# Altium PCB EP600_V1.6.1.PcbDoc
Units mil, origin at the board's own origin, x right, y up, seen from the top; angles counter-clockwise.
Board outline 8950 x 5110 mil, 2 copper layers (Top Layer, Bottom Layer); 119 components, 92 nets, 376 pads, 70 vias.
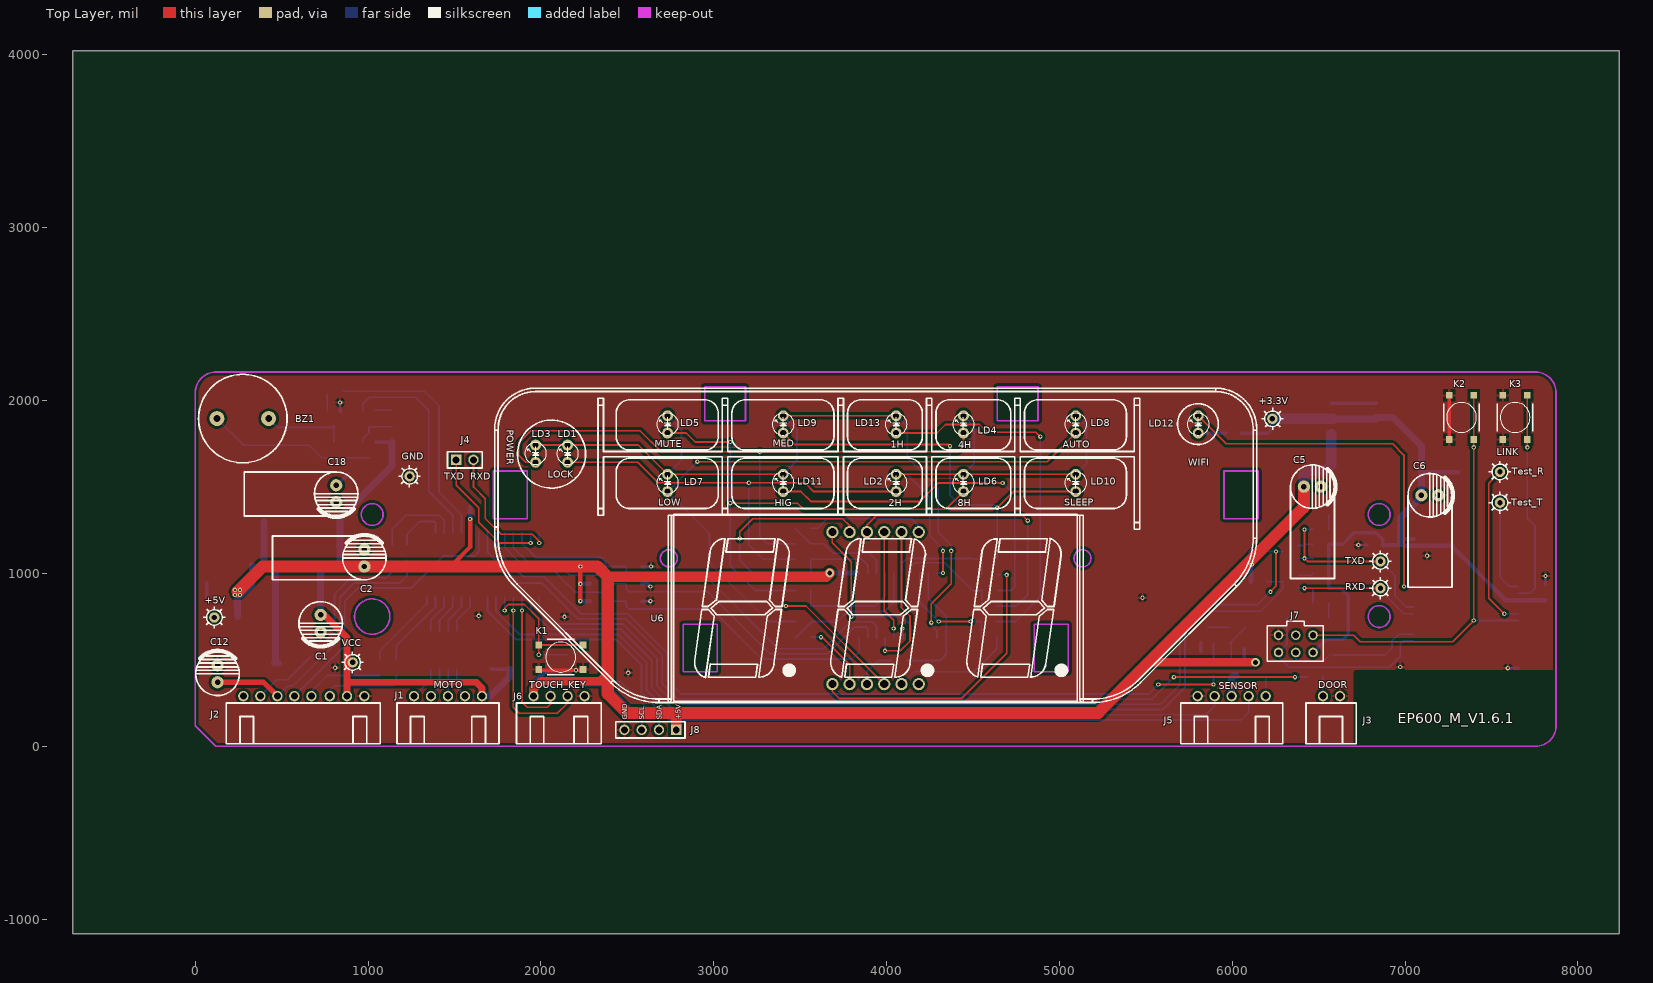
[diagram p0: Top Layer view]
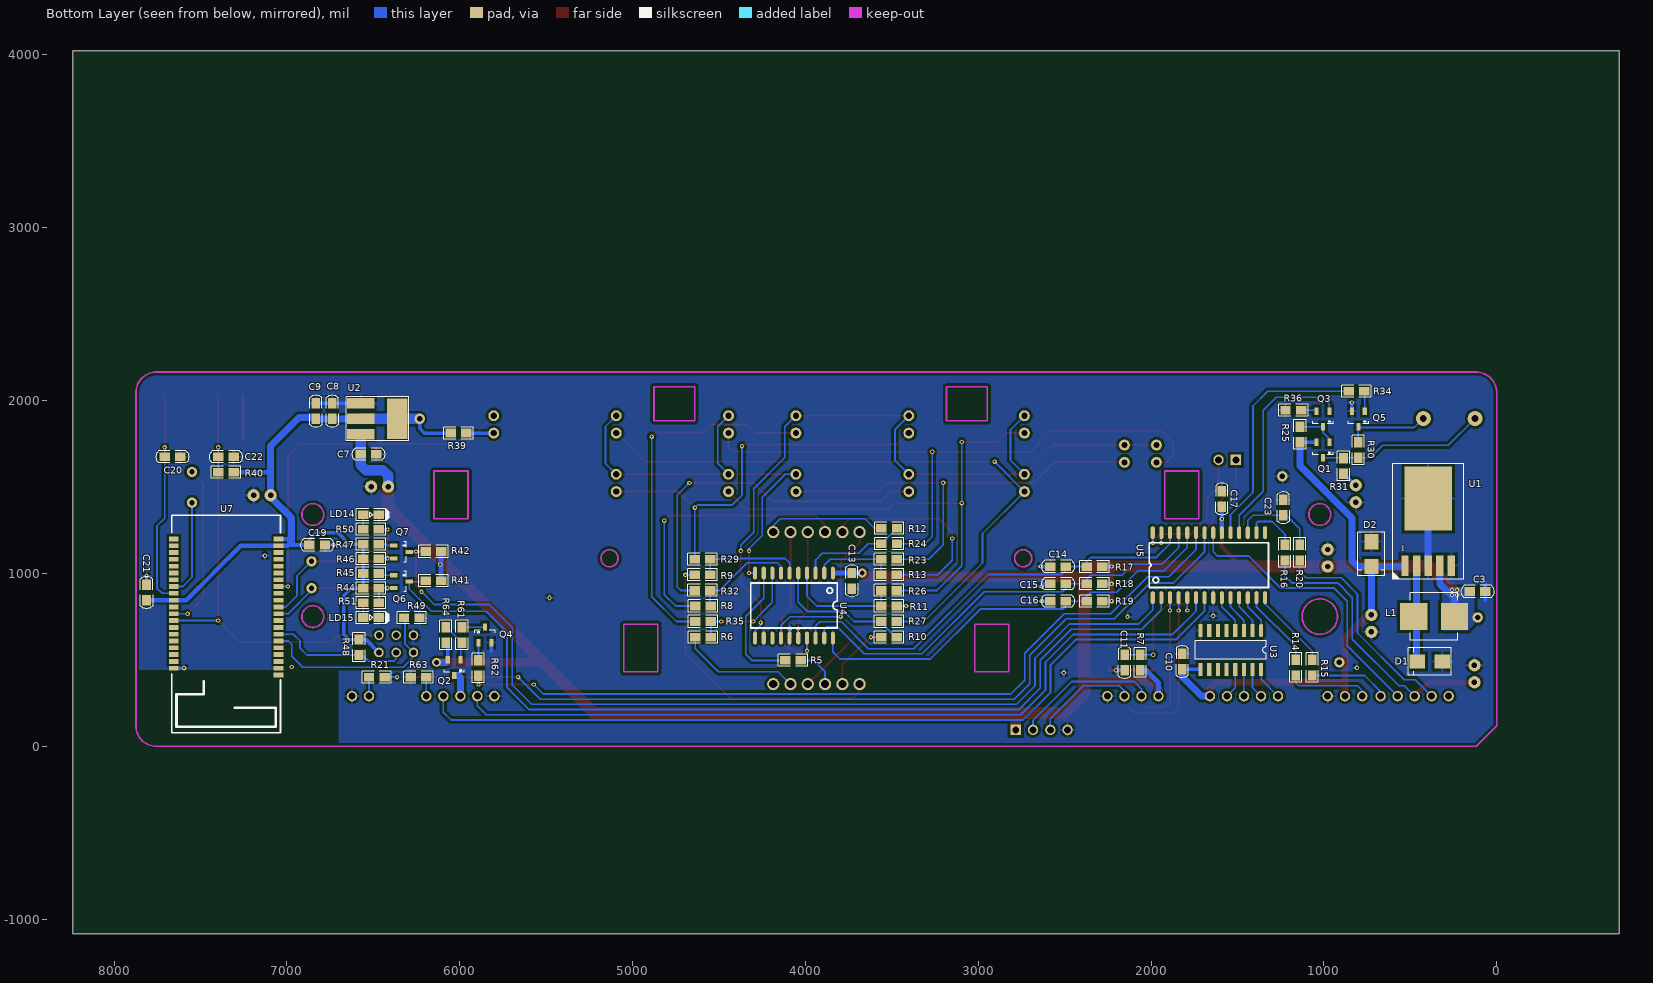
[diagram p1: Bottom Layer view, seen from below]

## Layer stack, top to bottom
Top Layer: signal copper 1.4
Dielectric: dielectric 12.6, FR-4, Dk 4.8
Bottom Layer: signal copper 1.4

## Board outline
-575,4025 8240,4025 8240,-1085 -710,-1085 -710,4025

## Design rules (kind name [scope] priority, off if disabled: settings)
Clearance [All] p1: gap=7
ComponentClearance [All] p1: gap=10 collisioncheckmode=3 verticalgap=10
PolygonConnect [All] p1: connectstyle=Relief reliefconductorwidth=15 reliefentries=4 polygonreliefangle="90 Angle"
RoutingVias [All] p1: holewidth=12 width=25 viastyle="Through Hole" minholewidth=12 minwidth=25 maxholewidth=28 maxwidth=50
SolderMaskExpansion [All] p1: expansion=4
TestPointUsage [All] p1: valid=0 allowmultiple=FALSE
Testpoint [All] p1: side=15 testpointundercomponent=TRUE minsize=40 maxsize=100 preferedsize=60 minholesize=0 maxholesize=40 preferedholesize=32 testpointgrid=1 style=1023 order=0123456789
Width [All] p1: maxlimit=100 minlimit=10 preferedwidth=10 minimp=50.000000 maximp=50.000000 favimp=50.000000
18 further rules are at their usual default settings.

## Classes and differential pairs
component class U_02-MCU: BZ1 C10 C11 C12 C13 C14 C15 C16 C17 C18 C23 J1 J2 J3 J4 J5 J6 J8 K1 LD1 LD2 LD3 LD4 LD5 LD6 LD7 LD8 LD9 LD10 LD11 LD13 Q1 Q2 Q3 Q4 Q5 R5 R6 R7 R8 R9 R10 R11 R12 R13 R14 R15 R16 R17 R18 R19 R20 R21 R23 R24 R25 R26 R27 R29 R30 R31 R32 R34 R35 R36 R61 R62 R63 R64 U3 U4 U5 U6
component class U_01-POWER: +3.3V +5V C1 C2 C3 C5 C6 C7 C8 C9 D1 D2 GND L1 U1 U2 VCC
component class U_03-WIFI: C19 C20 C21 C22 J7 K2 K3 LD12 LD14 LD15 Q6 Q7 R39 R40 R41 R42 R44 R45 R46 R47 R48 R49 R50 R51 RXD Test_R Test_T TXD U7 W_R

## Components (designator, comment, footprint, x,y, rotation, side; value= is the part's Value field where it differs from the comment)
+3.3V "T POINT A" TP_60_30 6232.24,1894.57 r180 top
+5V "T POINT A" TP_60_30 110,745 r0 top
BZ1 "BUZZER" BUZ1 125,1896 r0 top
C1 "100uF/35V" CE06150 725,760 r0 top
C2 "220uF/16V" "CE06150 - W"#1 978,1040 r180 top
C3 "1uF" 0805_C 65,895 r0 bottom
C5 "47uF/25V" "CE06150 - W"#2 6414.4,1502.18 r270 top
C6 "47uF/25V" "CE06150 - W"#2 7094.4,1452.18 r270 top
C7 "0.1uF" 0805_C 6482.8,1689.57 r0 bottom
C8 "0.1uF" 0805_C 6737.8,1984.57 r270 bottom
C9 "1uF" 0805_C 6832.8,1984.57 r270 bottom
C10 "0.1uF" 0805_C 1820,445 r90 bottom
C11 "0.1uF" 0805_C 2152.8,439.57 r90 bottom
C12 "100uF/16V" CE06150 128.35,370 r180 top
C13 "0.1uF" 0805_C 3731.07,1002.18 r270 bottom
C14 "100PF" 0805_C 2492.8,1039.57 r0 bottom
C15 "100PF" 0805_C 2492.8,939.57 r0 bottom
C16 "100PF" 0805_C 2492.8,839.57 r0 bottom
C17 "0.1uF" 0805_C 1590,1386 r90 bottom
C18 "47uF/25V" "CE06150 - W"#2 815,1510 r180 top
C19 "0.1uF" 0805_C 6780,1164.57 r0 bottom
C20 "0.1uF" 0805_C 7707.53,1674.57 r180 bottom
C21 "0.1uF" 0805_C 7812.79,935.24 r270 bottom
C22 "0.1uF" 0805_C 7307.8,1674.57 r0 bottom
C23 "1nF" 0805_C 1235,1426 r270 bottom
D1 "1N5824" SMB-DO-214AA_DIOM4436X24N 315,490 r0 bottom
D2 "SMBJ20A" SMB-DO-214AA_DIOM4436X24N 725,1184 r270 bottom
GND "T POINT A" TP_60_30 1240,1562.18 r0 top
J1 "CON5" XH2.54-5PW 1265,290 r0 top
J2 "CON8" XH2.54-8PW 277.8,290 r0 top
J3 "CON2" XH2.54-2PW 6525,290 r0 top
J4 "CON2" SIP2 1509.4,1657.18 r0 top
J5 "CON5" XH2.54-5PW 5800,290 r0 top
J6 "CON4" XH2.54-4PW 1957.05,290 r0 top
J7 "header-2x3-2d54" HT8550_FLASH_LOADER 6367.8,592.57 r180 top
J8 "CON4" SIP4 2782.8,94.57 r180 top
K1 "KEY" KEY_SMD5465 2242.8,444.57 r180 top
K2 "KEY" KEY_SMD5465 7255.8,1774.57 r90 top
K3 "KEY" KEY_SMD5465 7565.8,1774.57 r90 top
L1 "33uH/1A" SMD_S7-7-5 480,750 r180 bottom
LD1 "WHITE" LED1 2153.54,1692.91 r180 top (schematic designator LD5)
LD2 "WHITE" LED1 4055.12,1523.62 r180 top (schematic designator LD13)
LD3 "WHITE" LED1 1968.5,1692.91 r180 top (schematic designator LD6)
LD4 "WHITE" LED1 4444.88,1862.2 r180 top (schematic designator LD10)
LD5 "WHITE" LED1 2732.28,1862.2 r180 top (schematic designator LD1)
LD6 "WHITE" LED1 4444.88,1523.62 r180 top (schematic designator LD11)
LD7 "WHITE" LED1 2732.28,1523.62 r180 top locked
LD8 "WHITE" LED1 5094.49,1862.2 r180 top (schematic designator LD12)
LD9 "WHITE" LED1 3401.57,1862.2 r180 top locked (schematic designator LD3)
LD10 "WHITE" LED1 5094.49,1523.62 r180 top (schematic designator LD8)
LD11 "WHITE" LED1 3401.57,1523.62 r180 top (schematic designator LD2)
LD12 "WHITE" LED1 5803.15,1862.2 r180 top locked (schematic designator LD9)
LD13 "WHITE" LED1 4055.12,1862.2 r180 top (schematic designator LD4)
LD14 "LED_B" LED_0805 6557.8,1339.57 r180 bottom
LD15 "LED_Y" LED_0805 6557.8,744.57 r180 bottom
Q1 "2N3906" SOT23 967.99,1759.14 r270 bottom
Q2 "S8550" SOT23 5994.65,500 r270 bottom
Q3 "2N3904" SOT23 967.99,1939.14 r270 bottom
Q4 "2N3904" SOT23 5892.05,599.14 r90 bottom
Q5 "2N3904" SOT23 762.99,1939.14 r270 bottom
Q6 "BSS138" SOT23 6382.8,989.47 r180 bottom
Q7 "BSS138" SOT23 6382.8,1162.07 r180 bottom
R5 "220" 0805_R 4116.68,496.57 r180 bottom
R6 "220" 0805_R 4547,631.57 r0 bottom
R7 "10K" 0805_R 2062.8,529.57 r270 bottom
R8 "220" 0805_R 4547,811.57 r0 bottom
R9 "220" 0805_R 4549.79,991.57 r0 bottom
R10 "220" 0805_R 3471.68,631.57 r0 bottom
R11 "220" 0805_R 3561.68,811.57 r180 bottom
R12 "220" 0805_R 3470.07,1261.57 r0 bottom
R13 "220" 0805_R 3561.07,991.57 r180 bottom
R14 "330" 0805_R 1162.8,499.57 r270 bottom
R15 "330" 0805_R 1067.8,499.57 r270 bottom
R16 "330" 0805_R 1225,1165 r270 bottom
R17 "10K" 0805_R 2282.8,1039.57 r0 bottom
R18 "10K" 0805_R 2282.8,939.57 r0 bottom
R19 "10K" 0805_R 2282.8,839.57 r0 bottom
R20 "1k" 0805_R 1140,1165 r270 bottom
R21 "1K" 0805_R 6435,400 r0 bottom
R23 "220" 0805_R 3562.07,1081.57 r180 bottom
R24 "220" 0805_R 3560.07,1171.57 r180 bottom
R25 "4.7K" 0805_R 1137.99,1759.14 r90 bottom
R26 "220" 0805_R 3561.68,901.57 r180 bottom
R27 "220" 0805_R 3561.68,721.57 r180 bottom
R29 "220" 0805_R 4549.79,1081.57 r0 bottom
R30 "4.7K" 0805_R 800.99,1669.14 r90 bottom
R31 "100" 0805_R 885.99,1577.18 r90 bottom
R32 "220" 0805_R 4549.8,901.57 r0 bottom
R34 "4.7K" 0805_R 766.5,2054.57 r0 bottom
R35 "220" 0805_R 4547,721.57 r0 bottom
R36 "4.7K" 0805_R 1221.5,1944.57 r180 bottom
R39 "470" 0805_R 5963.15,1812.2 r0 bottom
R40 "10K" 0805_R 7397.53,1584.57 r180 bottom
R41 "10K" 0805_R 6107.8,957.07 r0 bottom
R42 "10K" 0805_R 6107.8,1127.07 r0 bottom
R44 "10K" 0805_R 6557.8,914.57 r180 bottom
R45 "10K" 0805_R 6557.8,999.57 r180 bottom
R46 "10K" 0805_R 6557.8,1084.57 r180 bottom
R47 "10K" 0805_R 6557.8,1169.57 r180 bottom
R48 "10K" 0805_R 6582.8,617.57 r270 bottom
R49 "10K" 0805_R 6232.8,742.57 r0 bottom
R50 "1K" 0805_R 6467.8,1254.57 r0 bottom
R51 "1K" 0805_R 6467.8,829.57 r0 bottom
R61 "4.7K" 0805_R 5987.05,689.14 r270 bottom
R62 "4.7K" 0805_R 5892.05,407.18 r90 bottom
R63 "0R" 0805_R 6193.7,400 r0 bottom
R64 "2K" 0805_R 6082.05,599.14 r90 bottom
RXD "Wi-Fi_RXD" TP_60_30 6857.8,914.57 r0 top (schematic designator TP2)
Test_R "TEST_RX" TP_60_30 7549.4,1587.18 r0 top (schematic designator TP4)
Test_T "TEST_TX" TP_60_30 7549.4,1409.57 r0 top (schematic designator TP3)
TXD "Wi-Fi_TXD" TP_60_30 6857.8,1069.57 r0 top (schematic designator TP1)
U1 "LM2596S-5.0" TO-263-5 530,1045 r180 bottom
U2 "AMS1117-3.3" SOT223 6467.8,1894.57 r0 bottom
U3 "ULN2004" SOP16 1362.8,669.57 r270 bottom
U4 "TM1620" SOP20 4066.07,814.17 r270 bottom
U5 "OB39R16A6" SOP28 1990,860 r90 bottom
U6 "SP410801K" LED08031 3936.07,799.21 r0 top locked
U7 "WIFI_3165" EMW3165-P 7654.8,1199.57 r0 bottom
VCC "T POINT A" TP_60_30 910,485 r0 top

## Footprints (in the part's own frame and the unit in brackets; to place one, negate y for a bottom-side part, rotate by r counter-clockwise, add the part's x,y. Pads: shape width x height; smd on the part's side, far side on the other; paste and mask are expansions set on the pad)
0805_C [mil]
  rect 60x50 smd: 1(0,0) 2(90,0)
  silkscreen extent -48,-35 139,35
0805_R [mil]
  rect 60x50 smd: 1(0,0) 2(90,0)
  silkscreen extent -40,-35 130,35
BUZ1 [mm]
  round 2.2 hole 1: 1(0,0) 2(7.6,0)
  silkscreen extent -2.7,-6.5 10.3,6.5
CE06150 [mm]
  round 1.8 hole 0.8: 1(0,0) 2(0,-2.5)
  silkscreen extent -3.2,-4.65 3.2,1.95
"CE06150 - W"#1 [mm]
  round 1.8 hole 0.8: 1(0,0) 2(0,-2.5)
  silkscreen extent -3.2,-4.65 13.5,1.96
"CE06150 - W"#2 [mm]
  round 1.8 hole 0.8: 1(0,0) 2(0,2.5)
  silkscreen extent -3.2,-1.96 13.5,4.65
EMW3165-P [mm]
  rect 1.45x0.7 smd: 1(0,0) 2(0,1) 3(0,2) 4(0,3) 5(0,4) 6(0,5) 7(0,6) 8(0,7) 9(0,8) 10(0,9) 11(0,10) 12(0,11) 13(0,12) 14(0,13) 15(0,14) 16(0,15) 17(0,16) 18(0,17) 19(0,18) 20(0,19) 21(-15.4,19) 22(-15.4,18) 23(-15.4,17) 24(-15.4,16) 25(-15.4,15) 26(-15.4,14) 27(-15.4,13) 28(-15.4,12) 29(-15.4,11) 30(-15.4,10) 31(-15.4,9) 32(-15.4,8) 33(-15.4,7) 34(-15.4,6) 35(-15.4,5) 36(-15.4,4) 37(-15.4,3) 38(-15.4,2) 39(-15.4,1) 40(-15.4,0) 41(-15.4,20)
  silkscreen extent -15.7,-3.5 0.3,28.5, body extent -16.23,-3.63 0.83,28.63, height 3
HT8550_FLASH_LOADER [mm]
  round 1.4 hole 0.9: 1(-2.54,1.27) 2(-2.54,-1.27) 3(0,1.27) 4(0,-1.27) 5(2.54,1.27) 6(2.54,-1.27)
  silkscreen extent -4.04,-3.33 4.16,2.57, body extent -4.04,-3.33 4.16,2.57, height 2.54
KEY_SMD5465 [mm]
  rect 1x1 smd: 1(0,0) 2(0,-3.6) 3(6.5,0) 4(6.5,-3.6)
  silkscreen extent 1.05,-4.4 5.45,0.8, body extent -0.25,-4.06 6.73,0.46, height 1.5
LED1 [mil]
  round 63 hole 35.43: A(0,50) K(0,-50)
  silkscreen extent -63,-64 63,62
LED08031 [mm]
  round 1.8 hole 1.2: 1(-6.35,-11.175) 2(-3.81,-11.175) 3(-1.27,-11.175) 4(1.27,-11.175) 5(3.81,-11.175) 6(6.35,-11.175) 7(6.35,11.175) 8(3.81,11.175) 9(1.27,11.175) 10(-1.27,11.175) 11(-3.81,11.175) 12(-6.35,11.175)
  silkscreen extent -29.65,-13.72 29.65,13.78
LED_0805 [mil]
  rect 60x50 smd: A(0,0) K(90,0)
  silkscreen extent -40,-35 150,35
SIP2 [mil]
  rect 60x60 hole 40: 1(0,0)
  round 60 hole 40: 2(100,0)
  silkscreen extent -50,-47 150,47
SIP4 [mil]
  rect 60x60 hole 40: 1(0,0)
  round 60 hole 40: 2(100,0) 3(200,0) 4(300,0)
  silkscreen extent -50,-47 350,47
SMB-DO-214AA_DIOM4436X24N [mm]
  rect 2.25x2.05 smd: 1(0,0) 2(3.65,0)
  silkscreen extent -1.35,-2 5,2, body extent -0.52,-1.97 4.17,1.97, height 2.44
SMD_S7-7-5 [mm]
  rect 4x4 smd: 1(0,0) 2(6,0)
  silkscreen extent -0.5,-3.5 6.5,3.5, body extent -0.5,-3.5 6.5,3.5, height 5
SOP16 [mil]
  oval 76x24 smd: 1(0,0)
  rect 76x24 smd: 2(0,-50) 3(0,-100) 4(0,-150) 5(0,-200) 6(0,-250) 7(0,-300) 8(0,-350) 9(225,-350) 10(225,-300) 11(225,-250) 12(225,-200) 13(225,-150) 14(225,-100) 15(225,-50) 16(225,0)
  silkscreen extent 60,-380 165,30
SOP20 [mil]
  oval 74x24 smd: 1(-188,225) 2(-188,175) 3(-188,125) 4(-188,75) 5(-188,25) 6(-188,-25) 7(-188,-75) 8(-188,-125) 9(-188,-175) 10(-188,-225) 11(188,-225) 12(188,-175) 13(188,-125) 14(188,-75) 15(188,-25) 16(188,25) 17(188,75) 18(188,125) 19(188,175) 20(188,225)
  silkscreen extent -130,-250 130,250
SOP28 [mil]
  oval 74x24 smd: 1(0,0) 2(0,-50) 3(0,-100) 4(0,-150) 5(0,-200) 6(0,-250) 7(0,-300) 8(0,-350) 9(0,-400) 10(0,-450) 11(0,-500) 12(0,-550) 13(0,-600) 14(0,-650) 15(376,-650) 16(376,-600) 17(376,-550) 18(376,-500) 19(376,-450) 20(376,-400) 21(376,-350) 22(376,-300) 23(376,-250) 24(376,-200) 25(376,-150) 26(376,-100) 27(376,-50) 28(376,0)
  silkscreen extent 58,-670 318,20
SOT23 [mm]
  rect 1.092x0.6 smd: 1(0,0) 2(0,-1.9) 3(2.308,-0.95)
  silkscreen extent 1.41,-2.45 1.85,0.55, body extent 0.45,-2.45 1.85,0.55, height 1.1
SOT223 [mil]
  rect 157.48x60 smd: 1(105,-90) 2(105,0) 3(105,90)
  rect 118.11x236.22 smd: 4(-105,0)
  silkscreen extent -172,-127 190,127
TO-263-5 [mm]
  rect 1.07x3 smd: 1(0,0) 2(1.7,0) 3(3.4,0) 4(5.1,0) 5(6.8,0)
  rect 7x9.4 smd: 6(3.41,9.878)
  silkscreen extent -1.8,-2 8.6,15, body extent 0,0 6.8,12.6, height 4.5
TP_60_30 [mil]
  round 60 hole 31.5: 1(0,0)
  silkscreen extent -64,-63 62,63
XH2.54-2PW [mil]
  round 60 hole 40: 1(0,0) 2(98.43,0)
  silkscreen extent -98,-276 192,-40, body extent -101,-276 192,-40, height 236
XH2.54-4PW [mil]
  round 60 hole 40: 1(0,0) 2(98.43,0) 3(196.85,0) 4(295.28,0)
  silkscreen extent -98,-276 392,-40, body extent -101,-276 392,-40, height 236
XH2.54-5PW [mil]
  round 60 hole 40: 1(0,0) 2(98.43,0) 3(196.85,0) 4(295.28,0) 5(393.7,0)
  silkscreen extent -98,-276 492,-40, body extent -101,-275 494,-40, height 236
XH2.54-8PW [mil]
  round 60 hole 40: 1(0,0) 2(98.43,0) 3(196.85,0) 4(295.28,0) 5(393.7,0) 6(500,0) 7(600,0) 8(700,0)
  silkscreen extent -98,-276 792,-40, body extent -101,-276 792,-40, height 236

## Part data
BZ1: "Buzzer"
C1 C2 C5 C6 C7 C14 C18: library part ECAP, "E-CAP"
C3: library part "Cap Semi", "Capacitor"
C8 C10 C11 C12 C13: library part CAP, "CAP"
C9 C15 C16 C17 C19 C20: library part "Cap Semi_1", "Capacitor"
C21: library part "CAP NP"
C22 C23: library part Cap, "Capacitor"
D1: library part "DIODE SCHOTTKY"
D2: library part "D Zener", "TVS"
J1 J6: library part CON6, "Connector"
J2: library part CON2, "Connector"
J3 J4: "Connector"
J5: library part "Header 4", "Header, 4-Pin"
K1: library part SW-PB
L1: library part Inductor, "Inductor"
LD1 LD2 LD3 LD4 LD5 LD6 LD7 LD8 LD9 LD10 LD11 LD12 LD13: library part LED, "LED"
LD14 LD15: library part LED
Q1 Q4 Q5: library part NPN
Q2 Q3: library part PNP
Q6 Q7: library part "N-Channel Enhancement MOSFET", "N-Channel Enhancement MOSFET"
R5 R6 R7 R8 R9 R10 R11 R12 R13 R14 R15 R19 R20 R21 R23 R24 R25 R26 R27 R29 R30 R31 R32 R34 R35 R36 R51: library part R0.25W, "RESISTOR"
R16 R17 R18 R61 R62 R63 R64: library part RES1
R39 R40 R41 R42 R44 R45 R46: library part Res3_3, "Resistor"
R47 R48 R49 R50: library part Res3, "Resistor"
RXD Test_R Test_T TXD: library part "T POINT A"
U1: library part LM2596T-5.0
U2: library part ULN2004
U3: library part LM78M05
U5: library part TMS1618
U7: library part AMS1117-3.3

## Via types
v1: diameter 25, hole 12, Top Layer to Bottom Layer, tented both sides, 68 vias
v2: diameter 50, hole 28, Top Layer to Bottom Layer, tented both sides, 2 vias

## Nets (pads, with @x,y where several pads share a name; then routed paths per layer and width w, separated by ;. In a path a pad name is that pad's centre, name@x,y a point inside that pad or via, vN(x,y) a via of type N, cw(c..) or ccw(c..) an arc to the next point about the centre after c; other vN are vias at no path point)
+3.3V: +3.3V.1 C6.1 C8.2 C9.2 C19.2 C21.2 J7.1 R39.2 R40.2 R44.1 R45.1 R46.1 R47.1 R48.1 U2.2 U2.4 U7.10 U7.39 U7.40 | length 4448.9
  Bottom Layer w20: R39.2 6205.39,1812.2 6232.24,1839.05 +3.3V.1 ; J7.1@6487.8,542.57 J7.1 6542.8,617.57 6642.08,617.57 6671.69,647.18 6671.69,870.68 6627.8,914.57 R44.1 R47.1 6639.64,1169.57 6704.4,1234.33 6831.69,1234.33 6870,1196.02 C19.2
  Bottom Layer w25: C19.2 6987,1164.57 ; U7.40 6996.57,1199.57 6987,1190 6987,1170 6996.8,1160.2 7267.84,1160.2 7423.13,1004.9 ; 7094.4,1607.18 7117.01,1584.57 R40.2 ; 7422.8,1004.57 7582.13,845.24 C21.2
  Bottom Layer w40: U2.2 C8.2 C9.2 ; C9.2@6829.4,1902.18 6929.4,1902.18 7094.4,1737.18 7094.4,1442.18 6974.4,1322.18 6974.4,1177.18
  Bottom Layer w60: +3.3V.1 U2.2@6582.79,1894.57
+5V: +5V.1 C2.1 C3.2 C5.1 C7.2 C13.1 C17.1 J6.1 J8.1 L1.2 Q2.2 R7.2 R17.1 R18.1 R19.1 R41.1 R42.1 R64.1 U1.4 U2.3 U4.1 U5.20 | length 12262.7
  Top Layer w25: 1475,1061 1498.36,1061 1590,1152.64 v1(1590,1315) ; v1(2227.8,839.57) 2227.8,1012.21
  Top Layer w50: J6.1 1957.05,332.05 2000,375 2340,375 2371.79,406.79 ; 5537.2,485 v2(6134.45,485)
  Top Layer w60: 2382.8,981.57 3650.46,981.57 v2(3671.07,1002.18) ; J8.1 2782.8,179.57
  Top Layer w70: 245,895 390,1040 1008,1040 2327.36,1040 2386.14,981.23 2386.14,303.86 2496.97,193.03 5224.4,193.03 6414.4,1383.03 C5.1
  Bottom Layer w20: Q2.2 6069.45,564.58
  Bottom Layer w25: U5.20 C17.1 ; v1(2227.8,839.57) R19.1 ; v1(2227.8,939.57) R18.1 ; v1(2227.8,1039.57) R17.1
  Bottom Layer w30: J6.1@1957.05,307.18 1957.05,367.18 2029.44,439.57 R7.2 ; v2(3671.07,1002.18) U4.1@3831.07,1002.18 ; R41.1@6107.8,954.57 R41.1 6107.8,1052.07 R42.1
  Bottom Layer w40: L1.2 243.78,854.57 329.21,940 U1.4 ; Q2.2@6079.45,485 v2(6134.45,485)
  Bottom Layer w60: C5.1 6414.4,1567.18 6444.4,1597.18 6542.79,1597.18 6572.79,1627.18 U2.3
  other v1: 228.78,875 258.78,875 228.78,905 258.78,905 6112.8,1052.07
CLK: C15.1 R18.2 U4.19 U5.25 | length 2545.5
  Bottom Layer w10: U5.25 1840,1150 1936.38,1053.62 2102.8,1053.62 2167.8,988.62 2351.49,988.62 2372.8,967.31 R18.2 C15.1 2492.8,910.83 2510,893.62 2965.91,893.62 3324.97,534.57 3658.8,534.57 3813.8,689.57 3878.8,689.57 3891.07,677.29 U4.19
DIO: C14.1 R17.2 U4.18 U5.26 | length 2541.1
  Bottom Layer w10: U5.26 1890,1171.42 1968.8,1092.62 2347.49,1092.62 2372.8,1067.31 R17.2 C14.1 2492.8,1015.82 2515,993.62 2943.34,993.62 3372.39,564.57 3635.8,564.57 3790.8,719.57 3917.8,719.57 3941.07,696.29 U4.18
EASY_LINK: C20.1 K3.2 K3.4 U7.9 | length 1244.7
  Top Layer w10: v1(7707.53,1729.57) K3.4
  Bottom Layer w10: U7.9 7722.57,884.61 7752.53,914.57 7752.53,1274.39 7707.53,1319.39 v1(7707.53,1729.57)
FG: C23.2 R20.1 U5.17 | length 508.3
  Bottom Layer w10: R20.1 1140,1259 1217,1336 1410,1336 1440,1306 U5.17
GND: C1.2 C2.2 C3.1 C5.2 C6.2 C7.1 C8.1 C9.1 C10.2 C11.1 C12.2 C13.2 C14.2 C15.2 C16.2 C17.2 C18.2 C19.1 C20.2 C21.1 C22.1 C23.1 D1.1 D2.1 GND.1 J2.8 J3.2 J5.1 J6.4 J7.6 J8.4 K1.1 K1.3 K2.1 K2.3 K3.1 K3.3 LD14.K LD15.K Q4.2 Q5.2 R36.1 R49.1 R63.2 U1.3 U1.5 U1.6 U2.1 U3.8 U4.12 U4.15 U5.8 U7.20 U7.21 | length 1652.5
  Top Layer w20: K1.3@1986.89,439.57 K1.1@2242.8,439.57 ; K2.1 K2.3
  Bottom Layer w20: 65,845 65,945 ; Q5.2 v1(837.8,1989.14) ; C11.1 v1(2202.8,439.57) ; C16.2 v1@2634.57,839.57 ; C15.2 2617.8,939.57 v1(2632.8,924.57) ; C14.2 v1@2634.57,1039.57 ; U4.15 v1(4091.07,680.96) ; 5817.24,549.14 Q4.2 ; U2.1 C9.1 ; v1(6730,1164.57) C19.1 ; v1(7594.79,451.54) U7.20 ; C21.1 v1(7812.79,985.24)
  Bottom Layer w40: U1.3 U1.6@396.14,1301.14
  other v1: 2505,425 809,454 6972,458 2136,749 1640,754.57 2632.8,839.57 5480.38,859.13 2637.8,1039.57 7127.53,1102.13
GRID1: U4.17 U6.8 | length 892.6
  Top Layer w10: v1(3991.07,552.18) 4079.1,552.18 4135.19,608.27 4135.19,753.27 4086.07,802.39 U6.8
  Bottom Layer w10: v1(3991.07,552.18) U4.17
GRID2: U4.16 U6.9 | length 635.8
  Top Layer w10: U6.9 3986.07,783.27 4041.07,728.27 v1(4041.07,680.96)
  Bottom Layer w10: U4.16 v1(4041.07,680.96)
GRID3: U4.14 U6.12 | length 973.5
  Top Layer w10: U6.12 3686.07,1177.39 3795.8,1067.67 v1(3795.8,749.57)
  Bottom Layer w10: v1(3795.8,749.57) 4088.67,749.57 4141.68,696.57 4141.68,626.78 U4.14
GRID5: LD1.K LD3.K LD5.K LD7.K LD9.K LD11.K LD13.K U4.11 | length 4446.3
  Top Layer w10: LD3.K 2562.99,1742.91 LD7.K LD11.K ; LD9.K LD13.K ; v1(4259,715.44) 4259,825.44 4374,940.44 v1(4374,1130.44)
  Bottom Layer w10: LD7.K 2812.8,1654.13 2812.8,1831.69 LD5.K ; LD11.K 3482.09,1654.13 3482.09,1831.69 LD9.K ; LD13.K 4119,1848.33 4119,1670.44 4299,1490.44 4299,1237.18 4374,1162.18 v1(4374,1130.44) ; v1(4259,715.44) 4259,700.44 4291.07,668.36 U4.11
GRID6: LD2.K LD4.K LD6.K LD8.K LD10.K U4.10 | length 2576.6
  Top Layer w10: LD2.K LD10.K@5096.85,1573.62 ; v1(4326.07,1002.18) v1(4326.07,1130.44)
  Bottom Layer w10: LD2.K 4115.81,1573.62 4249,1440.44 4249,1219.25 4326.07,1142.18 v1(4326.07,1130.44) ; U4.10 v1(4326.07,1002.18) ; LD6.K 4507.8,1636.54 4507.8,1849.29 LD4.K ; LD10.K 5156.5,1635.63 5156.5,1850.2 LD8.K
IIC_SCL: J6.3 J8.3 U5.4 | length 1642.1
  Top Layer w10: v1(1840,785) 1840,226 1875,191 2095,191 2153.9,249.9 J6.3
  Bottom Layer w10: v1(1840,785) U5.4 ; J6.3 2153.9,320.67 2182.8,349.57 2392.8,349.57 2582.8,159.57 J8.3
IIC_SDA: J6.2 J8.2 U5.3 | length 1671.8
  Top Layer w10: v1(1890,785) 1890,255 1920,225 2036,225 2055.47,244.47 J6.2
  Bottom Layer w10: v1(1890,785) U5.3 ; J6.2 2055.47,332.25 2097.8,374.57 2457.8,374.57 2682.8,149.57 J8.2
ION: R15.1 U5.14 | length 473.2
  Bottom Layer w10: R15.1 1067.8,550.87 1340,823.07 U5.14
MCU_RST: C11.2 K1.2 K1.4 R7.1 U5.5 | length 969.4
  Top Layer w10: v1@1790,780 1790,800 1810,820 1905,820 1986.89,738.11 v1(1986.89,529.57) ; K1.4 K1.2
  Bottom Layer w10: v1@1790,780 U5.5 ; v1(1986.89,529.57) C11.2
  other v1: 1790,785
MOT_1: U3.1 U5.12 | length 222.4
  Bottom Layer w10: U3.1 1362.8,729.57 1440,806.77 U5.12
MOT_2: U3.2 U5.11 | length 233.4
  Bottom Layer w10: U3.2 1412.8,729.57 1490,806.77 U5.11@1490,871
MOT_3: U3.3 U5.10 | length 222.4
  Bottom Layer w10: U3.3 1462.8,729.57 1540,806.77 U5.10
MOT_4: U3.4 U5.9 | length 222.4
  Bottom Layer w10: U3.4 1512.8,729.57 1590,806.77 U5.9
NetBZ1_1: BZ1.1 Q1.3 R30.1 R31.2 | length 974.7
  Bottom Layer w10: BZ1.1 280,1741 659,1741 730.86,1669.14 1004.53,1669.14 Q1.3
NetBZ1_2: BZ1.2 Q5.3 R30.2 | length 488.2
  Bottom Layer w10: BZ1.2 476.08,1844.14 Q5.3@800.99,1844.14 ; R30.2 Q5.3@800.99,1848.27
  Bottom Layer w20: Q5.3 Q5.3@800.99,1847.67
NetC12_1: C12.1 J2.3 R16.2 | length 1648.3
  Top Layer w30: C12.1 394.64,370 J2.3
  Bottom Layer w10: J2.3 534.65,350 565,350 835,620 835,860 920,945 1185,945 1225,985 R16.2
NetC18_1: C18.1 R31.1 | length 98.8
  Bottom Layer w20: C18.1 818.82,1510 R31.1
NetD1_2: D1.2 L1.1 U1.2 | length 568.6
  Bottom Layer w40: D1.2@458.7,480 463.07,484.37 U1.2 ; D1.2@478.7,480 D1.2@480,481.3
NetJ1_1: J1.1 U3.16 | length 195.1
  Bottom Layer w10: J1.1 1362.8,387.8 U3.16
NetJ1_2: J1.2 U3.15 | length 175
  Bottom Layer w10: J1.2 1412.8,339.37 U3.15
NetJ1_3: J1.3 U3.14 | length 153.6
  Bottom Layer w10: J1.3@1462.8,290.95 U3.14
NetJ1_4: J1.4 U3.13 | length 174.2
  Bottom Layer w10: U3.13 1512.8,337.48 J1.4
NetJ2_2: J2.2 R20.2 | length 1258.8
  Bottom Layer w10: J2.2 471.22,385 535,385 805,655 805,880 900,975 1105,975 1140,1010 R20.2
NetJ2_5: J2.5 R15.2 | length 461.1
  Bottom Layer w10: J2.5 671.5,316.07 765,409.57 R15.2
NetJ2_6: J2.6 R14.2 | length 477.6
  Bottom Layer w10: J2.6 777.8,322.8 805,350 1144,350 1162.8,368.8 R14.2
NetJ3_1: J3.1 R21.2 | length 110
  Bottom Layer w10: J3.1 R21.2
NetJ5_3: J5.3 Q2.3 | length 138.7
  Bottom Layer w40: J5.3 5996.85,398.15 6007.84,409.13 Q2.3@6022.84,409.13
NetJ5_5: J5.5 R63.1 | length 110
  Bottom Layer w10: J5.5 R63.1
NetLD1_A: LD1.A LD2.A R23.2 | length 2634.7
  Top Layer w10: LD1.A 2559.45,1642.91 2677.8,1524.57 3527.8,1524.57 3578.74,1473.62 LD2.A
  Bottom Layer w10: v1(3202.8,1524.57) 3202.8,1165.67 3286.9,1081.57 R23.2
NetLD3_A: LD3.A LD4.A R24.2 | length 3641.2
  Top Layer w10: LD3.A 1912.33,1642.91 1872.07,1683.17 1872.07,1757.17 1941.07,1826.17 2573.07,1826.17 2695.07,1704.17 4414.07,1704.17 4444.88,1734.99 LD4.A
  Bottom Layer w10: v1(3266.07,1704.17) 3266.07,1213.27 3307.77,1171.57 R24.2
NetLD5_A: LD5.A LD6.A R26.2 | length 2942.2
  Top Layer w10: LD5.A 2840.04,1812.2 2892.07,1760.17 v1(3095.07,1760.17) ; v1(3095.07,1406.57) 3484.68,1406.57 3519.68,1371.57 4342.83,1371.57 LD6.A
  Bottom Layer w10: v1(3095.07,1760.17) 3095.07,1044.93 3238.43,901.57 R26.2
NetLD7_A: LD7.A LD8.A R27.2 | length 3653.5
  Top Layer w10: v1(2905.07,1646.57) 4928.85,1646.57 LD8.A
  Bottom Layer w10: v1@2905.15,1646.49 LD7.A 2975.07,1230.84 2975.07,1059.93 3313.43,721.57 R27.2
NetLD9_A: LD9.A LD10.A R29.2 | length 2375.2
  Top Layer w10: LD9.A 3467.21,1746.57 4356.68,1746.57 v1(4366.68,1736.57) ; v1(4639.8,1380.57) 4732.85,1473.62 LD10.A
  Bottom Layer w10: v1(4366.68,1736.57) 4366.68,1453.2 4407.85,1412.02 4423.54,1396.34 4624.02,1396.34 v1(4639.8,1380.57) R29.2
NetLD11_A: LD11.A R32.2 | length 2079.2
  Top Layer w10: LD11.A 3504.62,1473.62 3561.68,1416.57 4191.68,1416.57 4298.68,1523.57 v1(4671.68,1523.57)
  Bottom Layer w10: R32.2 4721.67,901.57 4741.68,921.57 4741.68,1453.57 v1(4671.68,1523.57)
NetLD12_A: LD12.A R39.1 | length 160
  Bottom Layer w20: LD12.A@5803.15,1812.2 R39.1
NetLD13_A: LD13.A R35.2 | length 2122.3
  Top Layer w10: LD13.A 4291.31,1812.2 4340.68,1861.57 4537.68,1861.57 4581.68,1817.57 4863.68,1817.57 v1(4889.68,1791.57)
  Bottom Layer w10: R35.2 4745.67,721.57 4889.68,865.57 v1(4889.68,1791.57)
NetLD14_A: LD14.A R50.2 | length 85
  Bottom Layer w10: R50.2 LD14.A
NetLD15_A: LD15.A R51.2 | length 85
  Bottom Layer w10: LD15.A R51.2
NetQ1_1: Q1.1 Q3.3 R25.2 | length 237.6
  Bottom Layer w10: Q1.1 967.99,1779.13 1005.39,1816.54 Q3.3 1006.26,1849.13 R25.2
NetQ2_1: Q2.1 R61.2 R64.2 | length 233.8
  Bottom Layer w10: R61.2 R64.2@6077.05,689.14 ; Q2.1 R61.2@5994.65,606.54
NetQ3_2: Q3.2 R36.2 | length 93.7
  Bottom Layer w10: Q3.2@1037.8,1944.57 R36.2
NetQ4_1: Q4.1 R62.2 | length 102
  Bottom Layer w10: R62.2 Q4.1
NetQ4_3: Q4.3 R61.1 | length 131.5
  Bottom Layer w10: Q4.3@5855.51,689.14 R61.1
NetQ5_1: Q5.1 R34.1 | length 100
  Bottom Layer w10: Q5.1 R34.1@762.99,2039.13
NetQ6_1: Q6.1 R45.2 | length 89.2
  Bottom Layer w10: Q6.1 6457.7,989.47 R45.2
NetQ7_1: Q7.1 R47.2 | length 88.1
  Bottom Layer w10: Q7.1 6417.8,1162.07 6425.3,1169.57 R47.2
NetR5_2: R5.2 U6.3 | length 273.2
  Bottom Layer w10: U6.3@3886.07,392.96 U6.3 3886.07,430.96 3951.68,496.57 R5.2
NetR6_2: R6.2 U6.5 | length 703.7
  Bottom Layer w10: U6.5 4158.38,431.57 4505.3,431.57 4637,563.27 R6.2
NetR8_2: R8.2 U6.10 | length 1641.4
  Top Layer w10: U6.10 3886.07,1279.15 3942.49,1335.57 4786.68,1335.57 v1(4816.68,1305.57)
  Bottom Layer w10: R8.2 4750.67,811.57 4816.68,877.57 v1(4816.68,1305.57)
NetR9_2: R9.2 U6.1 | length 1685.3
  Top Layer w10: U6.1 3686.07,317.17 3727.68,275.57 4432.68,275.57 4694.67,537.57 v1(4694.67,991.57)
  Bottom Layer w10: R9.2 v1(4694.67,991.57)
NetR10_2: R10.2 U6.2 | length 403.3
  Top Layer w10: v1(3620.46,631.57) 3626.68,631.57 3786.07,472.17 U6.2
  Bottom Layer w10: R10.2 v1(3620.46,631.57)
NetR11_2: R11.2 U6.4 | length 811.7
  Top Layer w10: v1(3416.68,811.57) 3533.75,811.57 U6.4
  Bottom Layer w10: v1(3416.68,811.57) R11.2
NetR12_2: R12.2 U6.7 | length 702.2
  Bottom Layer w10: R12.2 3599.8,1261.57 3654.8,1316.57 4145.07,1316.57 4186.07,1275.57 U6.7
NetR13_2: R13.2 U6.11 | length 1205.3
  Top Layer w10: v1(3150.07,1201.57) 3150.07,1241.57 3225.07,1316.57 3745.07,1316.57 3786.07,1275.57
  Bottom Layer w10: v1(3150.07,1201.57) 3150.07,1076.57 3235.07,991.57 R13.2
RESET: C22.2 J7.2 K2.2 K2.4 R40.1 U7.13 | length 2701.9
  Top Layer w10: J7.2 6702.8,642.57 6740.8,604.57 7274.97,604.57 v1(7397.53,727.13) K2.4
  Bottom Layer w10: v1(7397.53,727.13) U7.13 ; R40.1 v1(7397.53,1729.57)
SCL: J5.4 U5.7 | length 4947.9
  Bottom Layer w10: U5.7 1690,785 1857.82,617.18 2436.07,617.18 2581.07,472.18 2581.07,312.18 2741.07,152.18 6050.88,152.18 6095.28,196.58 J5.4
SDA: J5.2 U5.6 | length 4655.6
  Bottom Layer w10: U5.6 1740,782.14 1874.96,647.18 2448.5,647.18 2611.07,484.6 2611.07,324.6 2753.5,182.18 5845.88,182.18 5898.43,234.73 J5.2
SEG1: R13.1 R23.1 U4.2 | length 478.8
  Bottom Layer w10: R13.1 3561.07,1080.57 R23.1 3857,1081.57 3891.07,1047.5 U4.2
SEG2: R12.1 R24.1 U4.3 | length 655.9
  Bottom Layer w10: R12.1 R24.1 ; R24.1@3535.07,1191.57 3540.07,1191.57 R24.1 ; U4.3 3941.07,1077.5 3901.39,1117.18 3691.07,1117.18 3636.68,1171.57 R24.1
SEG3: R11.1 R26.1 U4.4 | length 676.5
  Bottom Layer w10: R11.1@3561.68,810.9 3932.8,810.9 3991.07,869.17 U4.4 ; R11.1 R26.1
SEG4: R10.1 R27.1 U4.5 | length 824.5
  Bottom Layer w10: R10.1 3477.67,631.57 3566.07,719.97 3564.47,721.57 3718.46,721.57 3776.07,779.17 3986.07,779.17 4041.07,834.17 U4.5
SEG5: R9.1 R29.1 U4.6 | length 627.3
  Bottom Layer w10: U4.6 4091.07,1060.96 4116.68,1086.57 4496.07,1086.57 4501.07,1081.57 R29.1 ; R29.1@4544.8,1086.57 R29.1 ; R9.1 R29.1
SEG6: R8.1 R32.1 U4.7 | length 613.5
  Bottom Layer w10: U4.7 4141.07,1040.96 4161.68,1061.57 4336.07,1061.57 4496.07,901.57 R32.1 4549.8,814.36 R8.1
SEG7: R6.1 R35.1 U4.8 | length 661.7
  Top Layer w10: v1(4301.68,721.57) v1(4486.68,721.57)
  Bottom Layer w10: U4.8 4191.07,832.17 v1(4301.68,721.57) ; v1(4486.68,721.57) R35.1 R6.1
SEG8: R5.1 U4.9 | length 757.4
  Bottom Layer w10: R5.1 4310.68,496.57 4345.68,531.57 4345.68,752.57 4241.07,857.17 U4.9
SENS_P: R62.1 U5.23 | length 4764.3
  Top Layer w10: v1(5572.05,357.18) v1(5892.05,357.18)
  Bottom Layer w10: U5.23 1740,1136.38 1870.53,1005.85 1896.38,980 2019.5,980 2232.32,767.18 2501.07,767.18 2731.07,537.18 2731.07,382.18 2811.07,302.18 5517.05,302.18 v1(5572.05,357.18) ; v1@5574.55,354.68 v1@5577.05,357.18 ; v1(5892.05,357.18) R62.1
SPK+: Q3.1 U5.18 | length 1237.2
  Bottom Layer w10: Q3.1 967.99,1981.06 1006.5,2019.57 1274.4,2019.57 1350,1943.97 1350,1476 1490,1336 U5.18
SPK-: R34.2 U5.19 | length 1375.8
  Bottom Layer w10: R34.2 1324.4,2054.57 1410.1,1968.86 1410.1,1469.89 1540,1340 U5.19
STB: C16.1 R19.2 U4.20 U5.24 | length 2534.8
  Bottom Layer w10: U5.24 1790,1150 1925,1015 2075,1015 2198.38,891.62 2348.49,891.62 2372.8,867.31 R19.2 C16.1 2492.8,810.82 2510,793.62 2988.49,793.62 3277.54,504.57 3799.57,504.57 3841.07,546.07 U4.20
SWD_SWCLK: J7.5 R49.2 U7.25 | length 1156.7
  Bottom Layer w10: R49.2 6317.4,737.17 6317.4,592.17 J7.5 6267.8,517.57 6327.8,457.57 6909.26,457.57 6971.69,520 6971.69,589.33 6991.37,609.02 U7.25
SWD_SWDIO: J7.3 R48.2 U7.26 | length 790.2
  Bottom Layer w10: J7.3 6367.8,507.57 6382.8,492.57 6487.05,492.57 ; 6487.05,492.18 6527.05,492.18 ; 6527.44,492.57 R48.2@6562.44,527.57 ; R48.2 6884.31,527.57 6923.92,567.18 6923.92,608.92 6963.39,648.39 U7.26
TEST_RXD: Test_R.1 U7.12 | length 964.7
  Top Layer w10: Test_R.1 7484.79,1522.57 7484.79,856.5 v1(7574.79,766.5)
  Bottom Layer w10: v1(7574.79,766.5) U7.12
TEST_TXD: Test_T.1 U7.8 | length 559.4
  Bottom Layer w10: Test_T.1 7549.4,977.96 7603.39,923.98 U7.8
UART2_RXD: J4.2 U5.28 | length 804.3
  Top Layer w10: J4.2 1609.4,1500.6 1677.91,1432.09 1677.91,1318.1 1770,1226 1950,1226 1990,1186 v1(1990,1176)
  Bottom Layer w10: v1(1990,1176) U5.28
UART2_TXD: J4.1 U5.27 | length 825
  Top Layer w10: J4.1 1509.4,1510.6 1640,1380 1640,1296 1760,1176 v1(1940,1176)
  Bottom Layer w10: v1(1940,1176) U5.27
UART_RXD: Q7.3 R42.2 U5.1 | length 5413.4
  Top Layer w10: v1@6221.3,894.08 6252.8,925.57 v1(6252.8,1127.07)
  Bottom Layer w10: U5.1 1990,788.24 2071.07,707.18 2473.35,707.18 2671.07,509.45 2671.07,349.45 2778.35,242.18 5584.62,242.18 5697.05,354.6 5697.05,687.05 5830,820 6147.22,820 v1(6220.93,893.71) ; R42.2@6212.8,1127.07 6289.53,1127.07 Q7.3
UART_TXD: Q6.3 R41.2 U5.2 | length 5369.9
  Bottom Layer w10: U5.2 1940,790 2052.82,677.18 2460.92,677.18 2641.07,497.03 2641.07,337.03 2765.92,212.18 5597.05,212.18 5727.05,342.18 5727.05,662.05 5846.11,781.11 6163.33,781.11 6291.93,909.71 Q6.3 6202.8,952.07 R41.2
UV: R14.1 U5.13 | length 454.5
  Bottom Layer w10: R14.1 1162.8,580.87 1390,808.07 U5.13
UV电流检测: J2.4 U5.21 | length 1684
  Bottom Layer w10: J2.4 865,581.93 865,840 940,915 1249,915 1435,1101 1616,1101 1640,1125 U5.21@1640,1245
VCC: C1.1 C10.1 D2.2 J1.5 J2.7 Q1.2 R25.1 U1.1 U3.9 VCC.1 | length 3262.5
  Top Layer w40: C1.1@720,770 C1.1@730,760 ; C1.1 747.8,760 877.8,630 J2.7 ; 877.8,370 1626.5,370 1658.7,337.8 J1.5
  Bottom Layer w20: Q1.2 R25.1 ; U3.9@1713.23,445 C10.1
  Bottom Layer w40: U1.1 535,1040 718.7,1040 D2.2@725,1046.3 ; C1.1@725,778.78 D2.2 803.3,1040.3 836,1073 836,1321 1137.99,1622.99 R25.1 ; D2.2@725,1011.3 D2.2@730,1006.3 ; J1.5 1707.8,290 1820,402.2 C10.1 C10.1@1817.8,442.8
VSP: R16.1 U5.16 | length 316.2
  Bottom Layer w10: R16.1 1225,1226 1300,1301 1380,1301 1390,1291 U5.16
WIFI_LED: LD12.K U7.33 | length 2100.3
  Top Layer w10: LD12.K@5803.15,1912.2 5965.39,1749.96 6928.15,1749.96 6993.5,1684.61 v1(6993.5,923.98)
  Bottom Layer w10: v1(6993.5,923.98) U7.33
WIFI_RXD: Q6.2 R44.2 R51.1 RXD.1 U7.29 | length 858.8
  Top Layer w10: v1(6417.8,914.57) RXD.1
  Bottom Layer w10: Q6.2@6382.8,919.67 6387.9,914.57 R44.2 R51.1 ; RXD.1@6857.8,901.57 6992.87,766.5 U7.29
WIFI_TXD: Q7.2 R46.2 R50.1 TXD.1 U7.30 | length 1121.7
  Top Layer w10: v1(6417.8,1254.57) v1(6417.8,1087.27) 6435.49,1069.57 TXD.1 ; TXD.1@6855.1,1087.27 TXD.1@6857.8,1084.57
  Bottom Layer w10: Q7.2 6465.1,1087.27 R46.2 ; v1(6417.8,1254.57) R50.1 ; TXD.1 6941.69,985.68 6941.69,870.87 7006.69,805.87 U7.30
仓门检测: R21.1 U5.22 | length 5358.8
  Top Layer w10: v1@5662.05,400 v1(6362.8,400)
  Bottom Layer w10: U5.22 1690,1125 1870,945 2005,945 2212.82,737.18 2491.07,737.18 2701.07,527.18 2701.07,362.18 2791.07,272.18 5534.4,272.18 v1(5662.05,399.83) ; v1(6362.8,400) R21.1
pads on no net: J2.1 J7.4 U3.5 U3.6 U3.7 U3.10 U3.11 U3.12 U4.13 U5.15 U6.6 U7.1 U7.2 U7.3 U7.4 U7.5 U7.6 U7.7 U7.11 U7.14 U7.15 U7.16 U7.17 U7.18 U7.19 U7.22 U7.23 U7.24 U7.27 U7.28 U7.31 U7.32 U7.34 U7.35 U7.36 U7.37 U7.38 U7.41

## Polygon pours and split planes (outlines as drawn)
GND on Top Layer "Top Layer-No Net" (solid, remove dead copper, pour order 1000): -134.81,2384.24 -134.81,24.24 -84.81,-25.76 7780.19,-25.76 7995.19,189.24 7995.19,2294.24 7860.19,2429.24 -114.81,2429.24 -124.81,2419.24
GND on Bottom Layer "Bottom Layer-No Net" (solid, remove dead copper, pour order 1001): -31.97,2280.12 -86.97,2225.12 -86.97,2020.12 -86.97,145.12 123.03,-64.88 7813.03,-64.88 8028.03,150.12 8028.03,2095.12 7758.03,2365.12 7738.03,2345.12 78.03,2345.12 63.03,2360.12 -31.97,2360.12
+5V on Bottom Layer "Bottom Layer-No Net 1" (solid, remove dead copper, pour order 1000): 128.78,920 128.78,705 163.78,670 303.78,670 313.78,680 313.78,900 293.78,920

## Keep-outs
Keep-Out Layer:
  circle w9.84: c5133.45,1087.71 r49.21
  circle w9.84: c2739.75,1087.71 r49.21
  circle w9.84: c1023.22,1340.89 r62.99
  circle w9.84: c1023.22,750.34 r102.36
  circle w9.84: c6849.99,1340.89 r62.99
  circle w9.84: c6849.99,750.34 r62.99
  lines w9.84: 0,2051.15 cw(c120.08,2045.28) 114.21,2165.36 ; 0,2051.18 0,118.11 118.11,0 7755.91,0 ccw(c7755.91,118.11) 7874.02,118.11 7874.02,2043.31 ccw(c7754.24,2045.58) 7751.94,2165.35 114.17,2165.35 ; 4853.93,430.23 5050.78,430.23 5050.78,705.82 4853.93,705.82 ; 1724.01,1316.85 1920.86,1316.85 1920.86,1592.44 1724.01,1592.44 1724.01,1316.85 ; 2822.43,430.23 3019.28,430.23 3019.28,705.82 2822.43,705.82 2822.43,430.23 ; 2946.96,1882.99 3183.18,1882.99 3183.18,2079.84 2946.96,2079.84 2946.96,1882.99 ; 4639.88,1882.99 4876.1,1882.99 4876.1,2079.84 4639.88,2079.84 4639.88,1882.99 ; 5952.35,1316.85 6149.2,1316.85 6149.2,1592.44 5952.35,1592.44 5952.35,1316.85
  lines w10: 4853.93,430.23 4853.93,705.82

## Silkscreen, mask and mechanical layers (free items; w line width, h text height)
Top Overlay:
  drawing of 183 lines, arcs and shapes, not listed
  text "POWER" at 1803,1832 h40 r270
  text "MED" at 3342,1732 h40
  text "MUTE" at 2657,1729 h40
  text "1H" at 4025,1728 h40
  text "AUTO" at 5019,1727 h40
  text "4H" at 4415,1724 h40
  text "LINK" at 7530,1685 h40
  text "WIFI" at 5745,1622 h40
  text "LOCK" at 2040,1555 h40
  text "TXD" at 1439.4,1542.18 h40
  text "RXD" at 1589.4,1542.18 h40
  text "LOW" at 2679,1391 h40
  text "SLEEP" at 5029,1391 h40
  text "HIG" at 3352,1390 h40
  text "2H" at 4013,1390 h40
  text "8H" at 4411,1388 h40
  text "MOTO" at 1378.78,335 h40
  text "TOUCH_KEY" at 1932.8,334.57 h40
  text "DOOR" at 6498.78,335 h40
  text "SENSOR" at 5921.12,329.31 h40
  text "GND" at 2497.8,154.57 h30 r90
  text "SCL" at 2597.8,154.57 h30 r90
  text "SDA" at 2697.8,154.57 h30 r90
  text "+5V" at 2807.8,154.57 h30 r90
  text "EP600_M_V1.6.1" at 6959,133 h60
Mechanical 1:
  circle w9.84: c2739.75,1087.71 r49.21
  circle w9.84: c1023.22,1340.89 r62.99
  circle w9.84: c1023.22,750.34 r102.36
  circle w9.84: c5133.45,1087.71 r49.21
  circle w9.84: c6849.99,1340.89 r62.99
  circle w9.84: c6849.99,750.34 r62.99
  lines w9.84: 0,2051.15 cw(c120.08,2045.28) 114.21,2165.36 ; 0,2051.18 0,118.11 118.11,0 7755.91,0 ccw(c7755.91,118.11) 7874.02,118.11 7874.02,2043.31 ccw(c7754.24,2045.58) 7751.94,2165.35 114.17,2165.35 ; 4853.93,430.23 5050.78,430.23 5050.78,705.82 4853.93,705.82 ; 1724.01,1316.85 1920.86,1316.85 1920.86,1592.44 1724.01,1592.44 1724.01,1316.85 ; 2822.43,430.23 3019.28,430.23 3019.28,705.82 2822.43,705.82 2822.43,430.23 ; 2946.96,1882.99 3183.18,1882.99 3183.18,2079.84 2946.96,2079.84 2946.96,1882.99 ; 4639.88,1882.99 4639.88,2079.84 4876.1,2079.84 4876.1,1882.99 4639.88,1882.99 ; 5952.35,1316.85 5952.35,1592.44 6149.2,1592.44 6149.2,1316.85 5952.35,1316.85
  lines w10: 4853.93,430.23 4853.93,705.82
Drill Drawing:
  lines w9.84: 1724.01,1592.44 1731.88,1592.44 ; 1779.01,1316.85 1786.88,1316.85 ; 2946.96,2071.96 2946.96,2079.84 ; 4639.88,2071.96 4639.88,2079.84 ; 4876.1,2071.96 4876.1,2079.84 ; 6121.33,1316.85 6129.2,1316.85 ; 6141.33,1592.44 6149.2,1592.44

## Text inside footprints (layer, text, board x,y; h text height)
J7: Mechanical 10 "3" at 6367.8,555.17 h40 r180; Mechanical 10 "6" at 6267.8,655.17 h40 r180; Mechanical 10 "1" at 6467.8,555.17 h40 r180; Mechanical 10 "5" at 6267.8,555.17 h40 r180; Mechanical 10 "4" at 6367.8,655.17 h40 r180; Mechanical 10 "2" at 6467.8,655.17 h40 r180
U1: Bottom Overlay "1" at 555,1130 h30